# Altium PCB PCB.PcbDoc
Units mil, origin at the board's own origin, x right, y up, seen from the top; angles counter-clockwise.
Board outline 2362.2 x 2362.2 mil, 2 copper layers (Top Layer, Bottom Layer); 14 components, 6 nets, 38 pads, 20 vias.
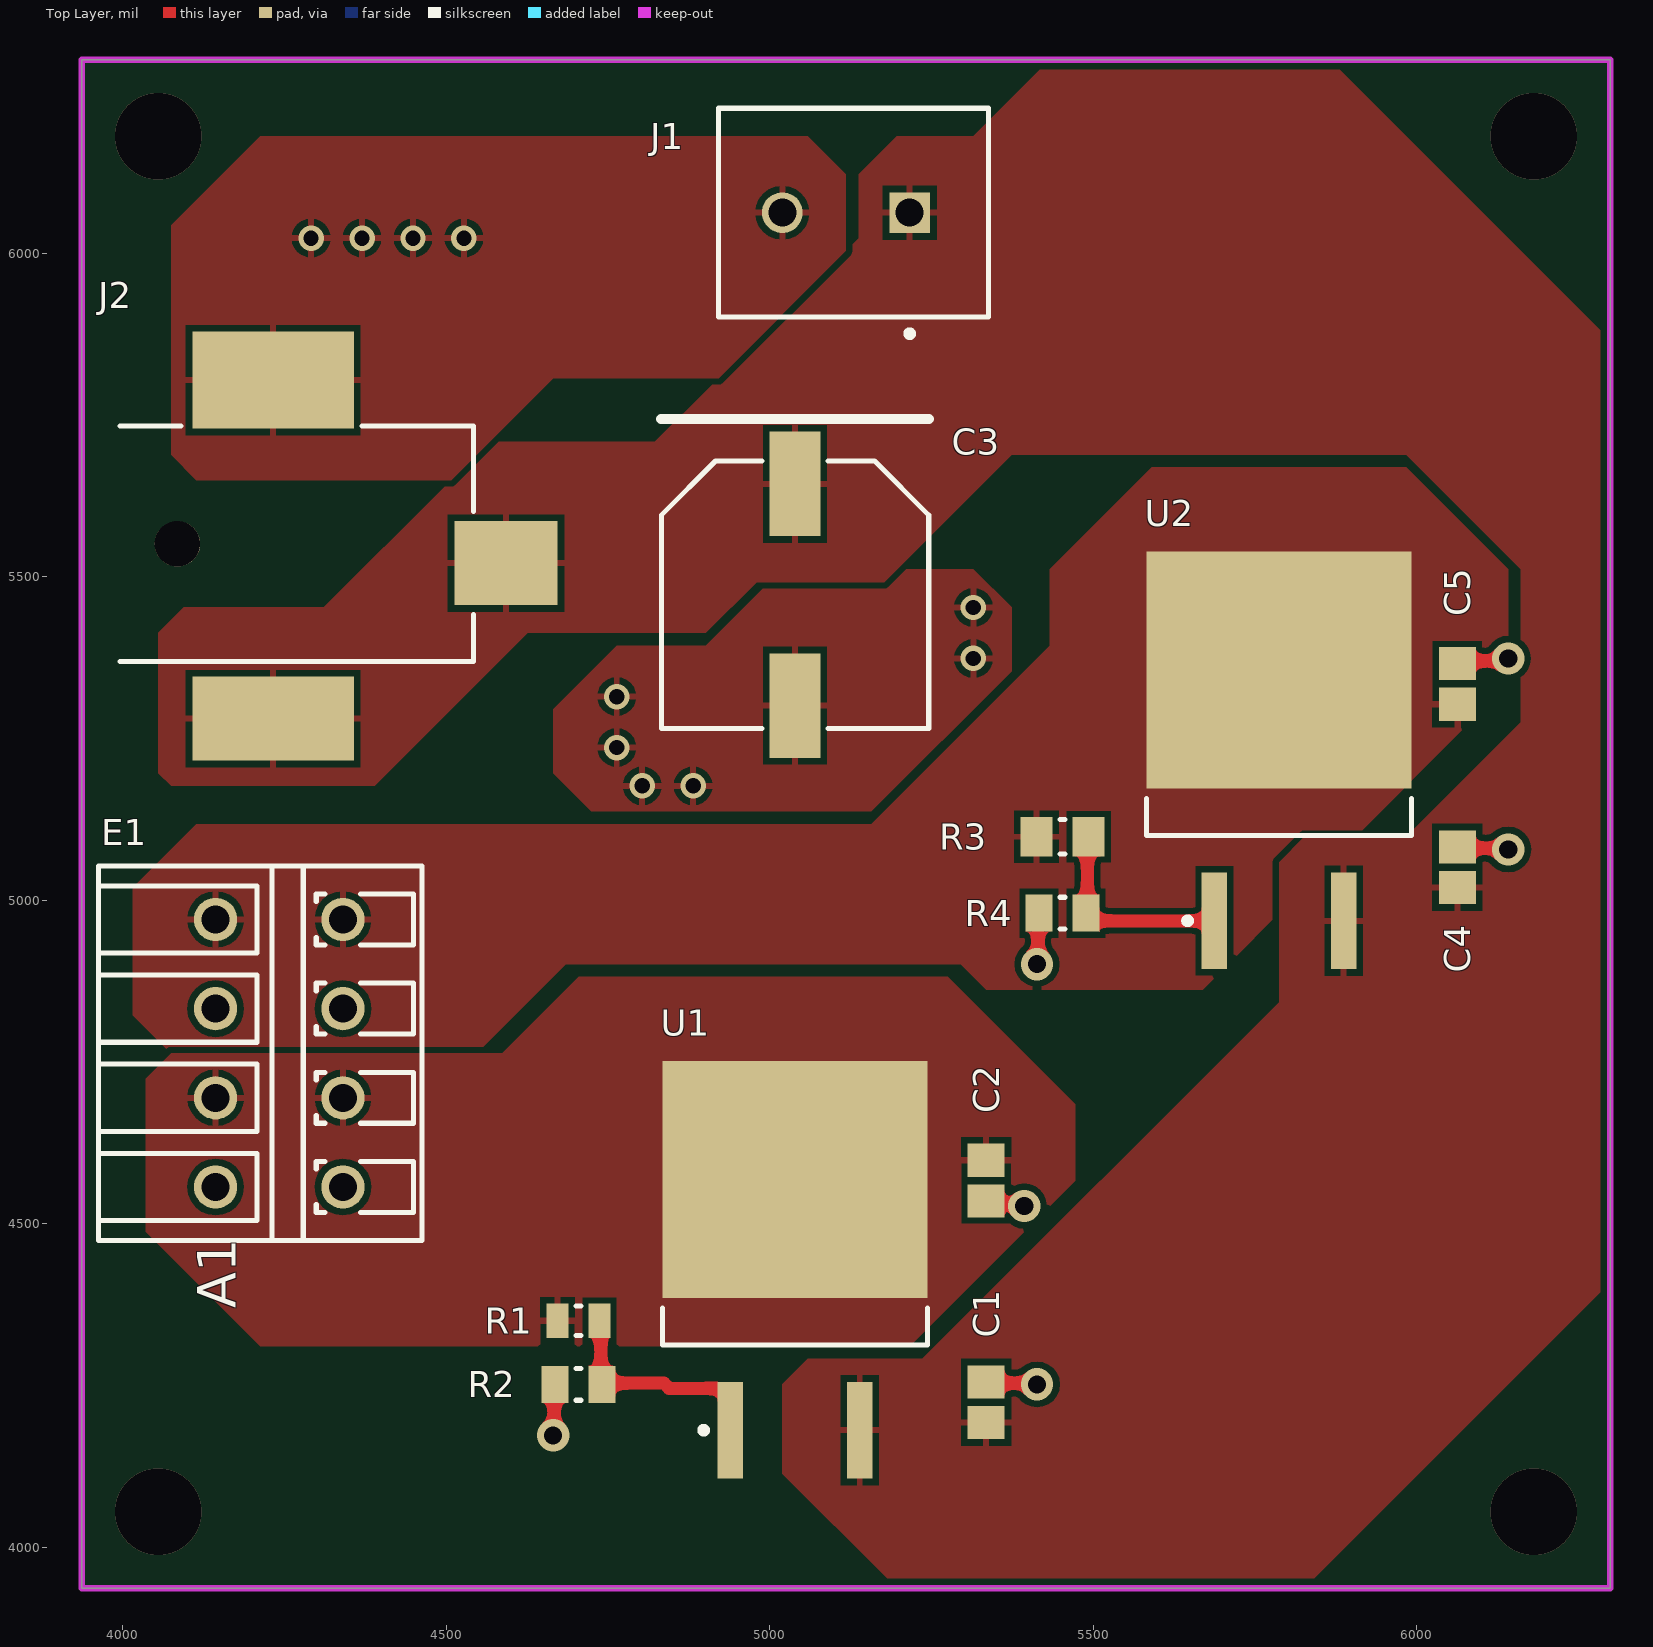
[diagram p0: Top Layer view]
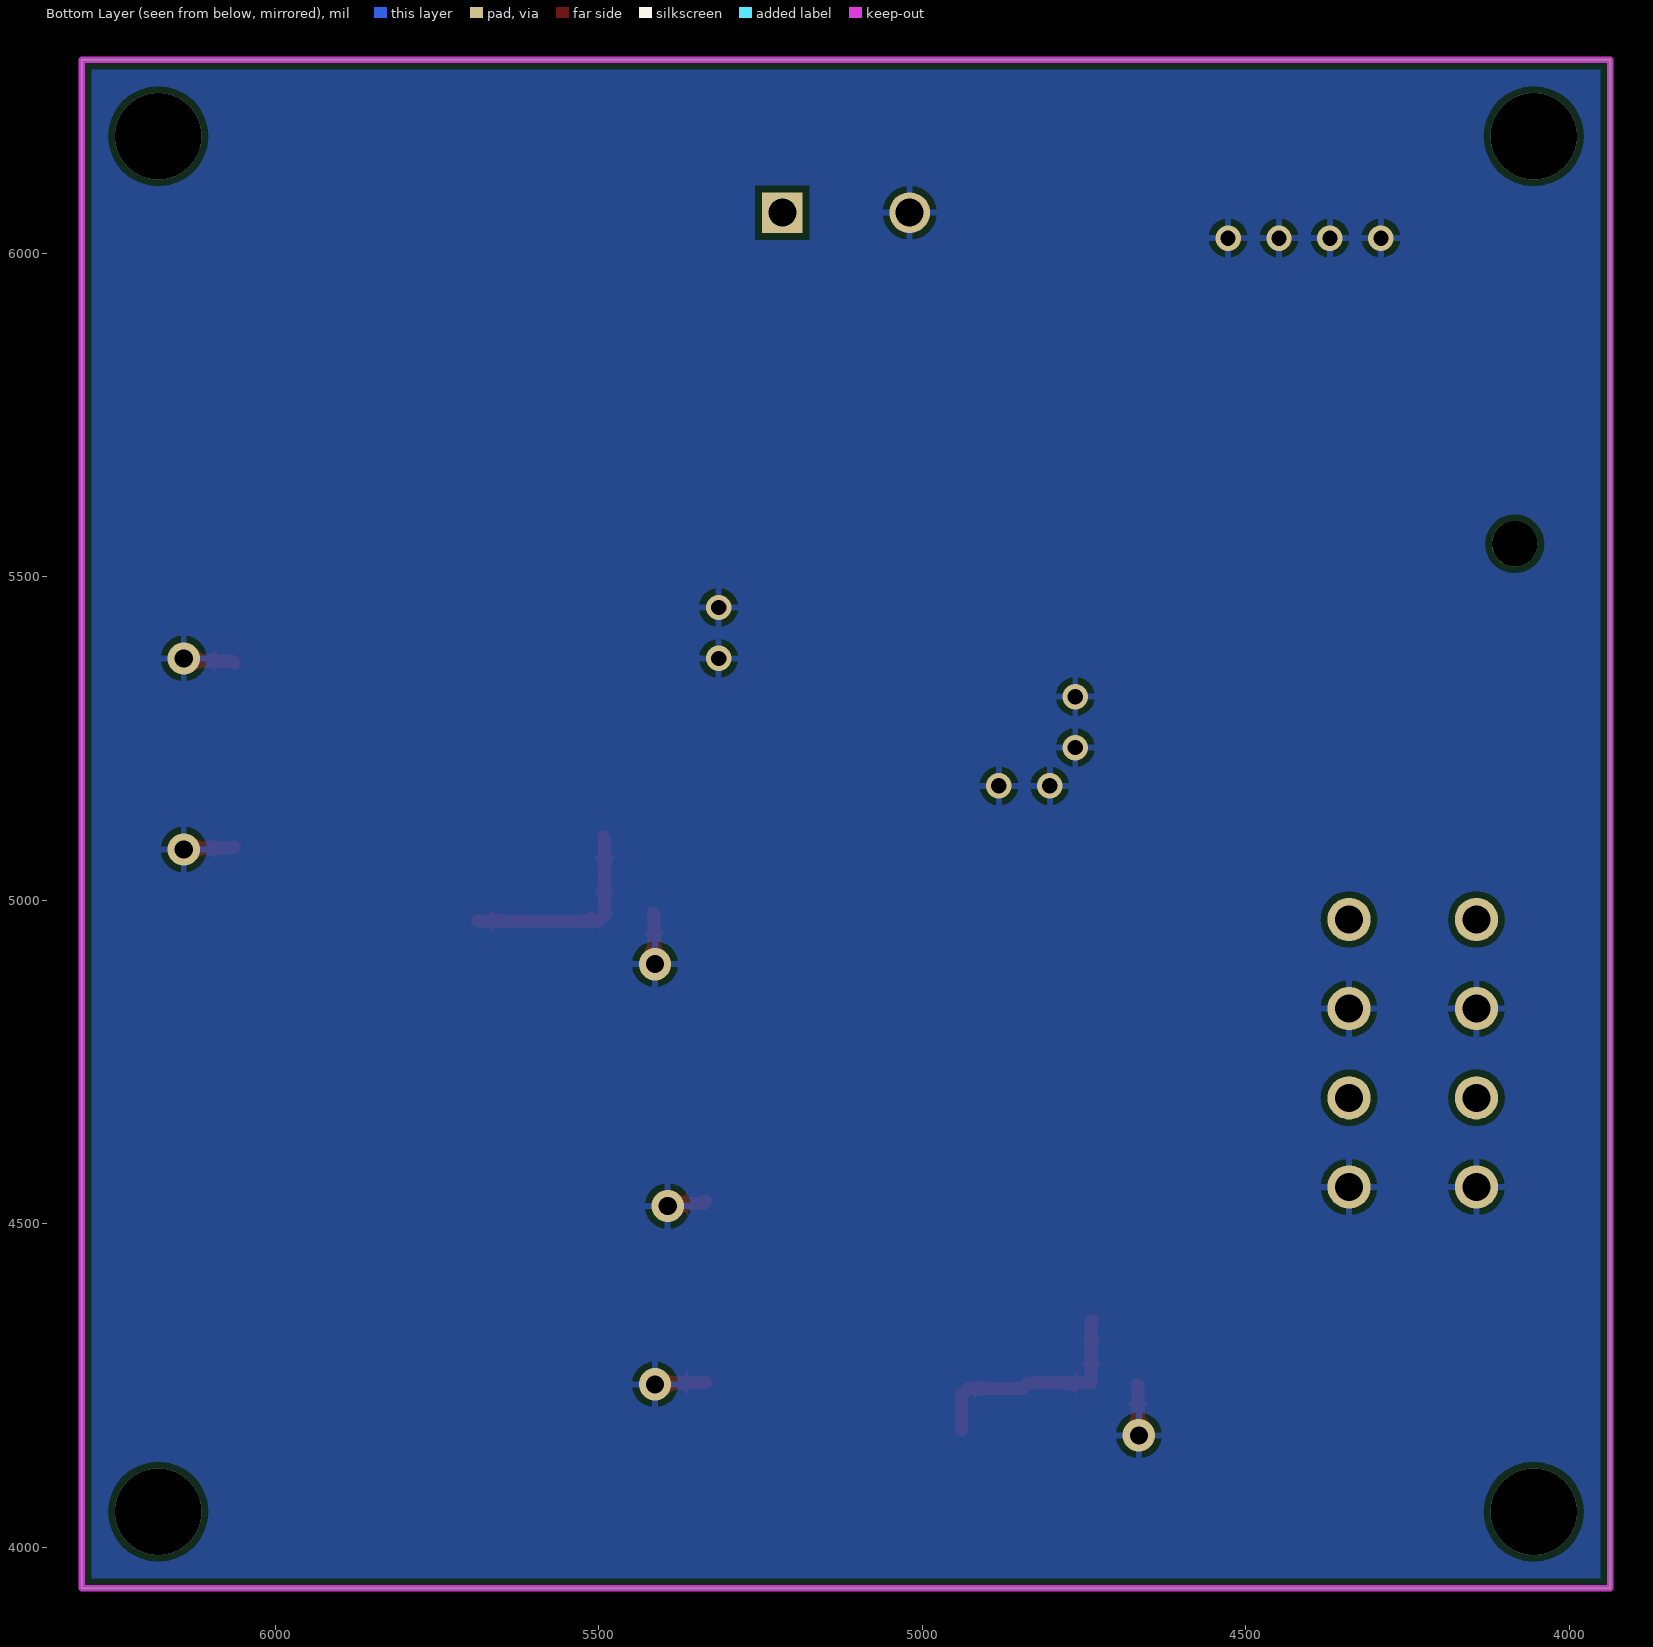
[diagram p1: Bottom Layer view, seen from below]

## Layer stack, top to bottom
Top Solder: solder mask 0.4, Solder Resist, Dk 3.5
Top Layer: signal copper 1.4
Dielectric 1: dielectric 12.6, FR-4, Dk 4.8
Bottom Layer: signal copper 1.4
Bottom Solder: solder mask 0.4, Solder Resist, Dk 3.5

## Board outline
3937.01,3937.01 6299.21,3937.01 6299.21,6299.21 3937.01,6299.21

## Design rules (kind name [scope] priority, off if disabled: settings)
Clearance [All] p1: gap=10 ignorepadtopadclearanceinfootprint=FALSE except(0: Arc-Hole Track-Hole SMDPad-Hole THPad-Hole Via-Hole Fill-Hole Poly-Hole Region-Hole Text-Hole)
HoleSize [All] p1: absolutevalues=TRUE maxlimit=250 minlimit=10 maxpercent=80.000 minpercent=20.000
MinimumSolderMaskSliver [All] p1: minsoldermaskwidth=6
PolygonConnect [All] p1: connectstyle=Relief reliefconductorwidth=10 reliefentries=4 polygonreliefangle="90 Angle" airgapwidth=10
RoutingVias [All] p1: holewidth=28 width=50 viastyle="Through Hole" minholewidth=28 minwidth=50 maxholewidth=28 maxwidth=50
SilkToSolderMaskClearance [IsPad] p1: minsilkscreentomaskgap=6 clearancetoexposedcopper=TRUE
SolderMaskExpansion [All] p1: expansion=4 istentingtop=FALSE
Width [All] p1: maxlimit=100 minlimit=6 preferedwidth=10
27 further rules are at their usual default settings.

## Classes and differential pairs
component class WP: J1 J2
component class RG: C1 C2 C3 C4 C5 R1 R2 R3 R4 U1 U2
component class CN: E1

## Components (designator, comment, footprint, x,y, rotation, side; value= is the part's Value field where it differs from the comment)
C1 "1uF" CAPC2013X100X50NL20T25 5334.65,4224.41 r270 top
C2 "1uF" CAPC2013X100X50NL20T25 5334.65,4566.93 r90 top
C3 "EEEFC1V101P" PNSC-FC-V-G_V 5039.37,5472.44 r270 top
C4 "1uF" CAPC2013X100X50NL20T25 6062.99,5051.18 r270 top
C5 "1uF" CAPC2013X100X50NL20T25 6062.99,5334.65 r270 top
E1 "1885200000" LSF_SMT_3_5_135_04 4212.6,4763.78 r90 top
J1 "282836-2" TECO-282836-2_V 5118.11,6062.99 r180 top
J2 "RASM722PTR13X" FP-RASM722PTR13X-MFG 4251.97,5551.18 r270 top
R1 "CRCW080513K0FKEA" RESC2013X50X30LL20T20 4704.72,4350.39 r180 top
R2 "CRCW08052K40FKEA" RESC2013X50X30NL20T20 4704.72,4251.97 r180 top
R3 "CRCW08059K10FKEA" RESC2013X50X30ML20T20 5452.76,5098.43 r180 top
R4 "CRCW08052K40FKEA" RESC2013X50X30NL20T20 5452.76,4980.32 r180 top
U1 "LM317D2T-TR" TO-263_N 5039.37,4429.13 r90 top
U2 "LM317D2T-TR" TO-263_N 5787.4,5216.54 r90 top

## Footprints (in the part's own frame and the unit in brackets; to place one, negate y for a bottom-side part, rotate by r counter-clockwise, add the part's x,y. Pads: shape width x height; smd on the part's side, far side on the other; paste and mask are expansions set on the pad)
CAPC2013X100X50NL20T25 [mm] "Chip Capacitor, 2-Leads, Body 2.00x1.25mm, IPC Medium Density"
  rect 1.3x1.45 smd: 1(-0.8,0) 2(0.8,0)
  body extent -1.1,-0.72 1.1,0.72, height 1
FP-RASM722PTR13X-MFG [mm]
  rect 3.3x4.06 smd paste+0 mask+0: 1(0.76,8.65)
  rect 3.81x6.35 smd paste+0 mask+0: 2(-6.43,-0.49)
  rect 3.3x6.35 smd paste+0 mask+0: 3(6.86,-0.49)
  round 1.78 hole 1.78 unplated paste-1000 mask+0: ""(0,-4.25)
  silkscreen extent -4.63,-6.5 4.63,7.38, body extent -8.43,-7.48 8.61,10.78, height 0.25
LSF_SMT_3_5_135_04 [mm] "OMNIMATE Signal - Serie LSF  LSF-SMT 3.50/04/135 1.5"
  round 1.7 hole 1.1: A1(-5.25,-3.25) A1(-5.25,1.75) A2(-1.75,1.75) A2(-1.75,-3.25) A3(1.75,1.75) A3(1.75,-3.25) A4(5.25,-3.25) A4(5.25,1.75)
  silkscreen extent -7.35,-6.35 7.35,6.35, body extent -7.35,-6.35 7.35,6.35, height 13.17
PNSC-FC-V-G_V [mm] "CAPAE, 2-Leads, Body 10.50x10.50mm"
  rect 4.1x2 smd: 1(-4.35,0) 2(4.35,0)
  silkscreen extent -6.9,-5.25 5.25,5.25, body extent -6,-5.25 6,5.25, height 10.5
RESC2013X50X30LL20T20 [mm] "Chip Resistor, 2-Leads, Body 2.00x1.25mm, IPC High Density"
  rect 0.85x1.35 smd: 1(-0.825,0) 2(0.825,0)
  silkscreen extent -0.1,-0.58 0.1,0.58, body extent -1.1,-0.72 1.1,0.72, height 0.5
RESC2013X50X30ML20T20 [mm] "Chip Resistor, 2-Leads, Body 2.00x1.25mm, IPC Low Density"
  rect 1.25x1.55 smd: 1(-1.025,0) 2(1.025,0)
  silkscreen extent -0.1,-0.67 0.1,0.67, body extent -1.1,-0.72 1.1,0.72, height 0.5
RESC2013X50X30NL20T20 [mm] "Chip Resistor, 2-Leads, Body 2.00x1.25mm, IPC Medium Density"
  rect 1.05x1.45 smd: 1(-0.925,0) 2(0.925,0)
  silkscreen extent -0.1,-0.63 0.1,0.63, body extent -1.1,-0.72 1.1,0.72, height 0.5
TECO-282836-2_V [mm] "Female Header, Pitch 5mm, 1 x 2 Position, Height 10mm"
  rect 1.6x1.6 hole 1.1: 1(-2.5,0)
  round 1.6 hole 1.1: 2(2.5,0)
  silkscreen extent -5.6,-4.1 5,4.87, body extent -5.6,-4.1 5,4.1, height 10
TO-263_N [mm] "D2-PAK, 4-Leads, Body 9.2x10.2mm, Pitch 2.54mm, Lead Span 15.4mm, IPC Medium Density"
  rect 3.8x1 smd: 1(-6.3,2.54) 3(-6.3,-2.54)
  rect 9.3x10.4 smd: 4(3.55,0)
  silkscreen extent -6.42,-5.2 -1.5,5.2, body extent -2.95,-5.2 6.4,5.2, height 4.6

## Part data
C1 C2 C4 C5: library part CMP-2007-03716-1, Manufacturer=Kemet, Part Number=C0805X105K3RACTU
C3: library part CMP-2000-06202-1, "Aluminum Electrolytic Capacitor, 100 uF, +/- 20%, 35 V, 2-Pin SMD (Size Code G), -40 to 105 degC, RoHS, Tape and Reel", AE Capacitor Case=RadialCan-SMD, Capacitance=100µF, Capacitance Tolerance=±20%, Impedance Frequency=100kHz, Impedance Temperature=20°C, Life Time @ Temperature=1000hours@105°C, Manufacturer=Panasonic, Operating life Time=1000h, Operating Temperature Max=105°C, Operating Temperature Min=-40°C, Operating Temperature Range=-40°Cto+105°C, Package / Case=G, Package Description="2-Pin Electrolytic Aluminum Capacitor, Body 10.3 x 10.3 mm", Package Reference=FC-V-G, Power Factor=0.12, Power Factor Frequency=120Hz, Ripple Current AC=220mA, Tolerance +=20%, Voltage Rating=35V, Capacitance Tolerance ±=±20%, Capacitor Case Style=RadialCan-SMD, Datasheet URL=http://industrial.panasonic.com/cdbs/www-data/pdf/RDE0000/ABA0000C1172.pdf, Datasheet Version=03/2016, Diameter=10mm, External Length / Height=10.2mm, External Width=10.3mm, Height=10.2mm, Impedance=0.4ohm, Lead Cross-section Width=0.9mm, Lifetime @ Temperature=1000hours@105°C, Manufacturer URL=http://www.panasonic.com/, Mounting Technology=SurfaceMount, MSL=(NotAvailable), Operating Lifetime=1000h, Package URL=http://industrial.panasonic.com/cdbs/www-data/pdf/RDE0000/DME0000COL48.pdf, Packaging=CutTape, Power Factor Temperature=20°C, Product Range=PANASONIC-FCSeries, Ripple Current Frequency=100kHz, Ripple Current Temperature=105°C, Series=FC, SVHC=ToBeAdvised, Tape Width=16mm, Tolerance -=20%, Voltage Rating V DC=35V
E1: library part CMP-1559-02099-1, "OMNIMATE Signal - series LSF", Colour=Black, Manufacturer=Weidmueller, Rated_current_min_no_of_poles_TU_20_deg_C="19 A", Rated_current_use_group_B_UL_1059="12 A", Rated_voltage_for_surge_voltage_class_pollution_degree_II_2="320 V", Rated_voltage_use_group_B_UL_1059="300 V", UL_94_flammability_rating=V-0, ComponentLink1Description="Manufacturer URL", ComponentLink1URL=http://www.weidmueller.com/, ComponentLink2Description="URL Link1", ComponentLink2URL=http://catalog.weidmueller.com/catalog/Start.do?localeId=en&ObjectID=1885200000, Contact_material=Cu-Leg, Contact_surface=tinned, Insulating_material="LCP GF", Mounting_onto_the_PCB="Reflow solder connection", No_of_poles=4, PackageReference=LSF_SMT_3_5_135_04, Packaging=Tube, PartNumber=1885200000, Pitch_inch="0,138 inch", Pitch_mm="3,5 mm", Qty="37 PCS", Revision=V1, Short_text_for_material="LSF-SMT 3.50/04/135 1.5SN BK TU", Side_termination_characteristic="closed side", Solder_pin_length_mm="1,5 mm", Solid_max_H05_07_V_U="1,5 mm²", Solid_min_H05_07_V_U="0,2 mm²", Wire_cross_section_AWG_max_UL_1059="AWG 16", Wire_cross_section_AWG_min_UL_1059="AWG 24"
J1: library part CMP-1684-00017-1, "Female Header, Pitch 5 mm, 1 x 2 Position, Height 10 mm, Tail Length 3.5 mm, Rohs, Bulk", Color=Green, Current=13.5A, Manufacturer="TE Connectivity", Package Description="Female Header, Pitch 5 mm, 1 x 2 Position, Height 10 mm, Tail Length 3.5 mm", Package Reference=THD, Standard Package=300, Voltage=300V, 3D Model=282836-2.pdf, Category=Connectors,Interconnects, Clamp Material - Plating=Brass-NickelPlated, Contact Material - Plating=Brass-TinPlated, Datasheet URL=http://www.te.com.cn/commerce/DocumentDelivery/DDEController?Action=showdoc&DocId=Catalog+Section%7F1308389_EUROSTYLE_TERMINAL_BLOCKS%7F0607%7Fpdf%7FEnglish%7FENG_CS_1308389_EUROSTYLE_TERMINAL_BLOCKS_0607.pdf%7F282836-2, Dynamic Catalog=BuchananSeries, Family=TerminalBlocks-WiretoBoard, Featured Product=EurostyleTerminalBlockConnectors, Features=Interlocking(Side), Housing Material=Polyamide(PA66),Nylon6/6, Manufacturer URL=http://www.te.com, Mating Orientation=HorizontalwithBoard, Mounting Type=ThroughHole, Number of Levels=1, Other Names="5ULV-02B / A98076", Packaging=Bulk, Pitch="0.197\"(5.00mm)", Positions Per Level=2, Product Training Modules=Wire-to-BoardEurostyleTerminalBlocks, RoHS Information=282836-2StatementofCompliance, Screw Material - Plating=Brass-NickelPlated, Screw Thread=M3, Series=Buchanan, Torque - Screw=0.68Nm(6Lb-In), Wire Gauge=16-30AWG, Wire Termination=Screw-RisingCageClamp
J2: library part CMP-47995-000002-1, "CONN PWR JACK 2.1X5.5MM SOLDER", Case/Package=SMD/SMT, Color=Black, Current Rating=5A, Package Quantity=120, Connector Type=Jack, Contact Material="Copper Alloy", Contact Plating=Tin, Gender=Male, Housing Color=Black, Housing Material=Thermoplastic, Mount="Surface Mount", Shielding=Unshielded, Termination=Solder
R1: library part CMP-2001-04945-1, Manufacturer="Vishay Dale", Part Number=CRCW080513K0FKEA
R2 R4: library part CMP-2001-03768-1, Manufacturer="Vishay Dale", Part Number=CRCW08052K40FKEA
R3: library part CMP-2001-04176-1, Manufacturer="Vishay Dale", Part Number=CRCW08059K10FKEA
U1 U2: library part CMP-0244-00094-1, "1.5A, 1.2V to 37V Adjustable Voltage Regulator, 3-Pin D2PAK, Tape and Reel", ComponentLink1Description="Manufacturer URL", ComponentLink1URL=http://www.st.com, ComponentLink2Description=Datasheet, ComponentLink2URL=http://www.st.com/internet/com/TECHNICAL_RESOURCES/TECHNICAL_LITERATURE/DATASHEET/CD00000455.pdf, DatasheetVersion=1/11/2011, PackageDescription="3-Pin Transistor Outline Package 2.54 mm Pitch, 15.4 mm Lead Span (D2PAK)", PackageReference=TO-263, PackageVersion=2011

## Via types
v1: diameter 39.37, hole 23.62, Top Layer to Bottom Layer, 10 vias
v2: diameter 50, hole 28, Top Layer to Bottom Layer, 6 vias
v3: diameter 133.86, hole 133.86, Top Layer to Bottom Layer, 4 vias

## Nets (pads, with @x,y where several pads share a name; then routed paths per layer and width w, separated by ;. In a path a pad name is that pad's centre, name@x,y a point inside that pad or via, vN(x,y) a via of type N, cw(c..) or ccw(c..) an arc to the next point about the centre after c; other vN are vias at no path point)
+6V: C5.2 E1.A4 R3.2 U2.4
+8V: C2.2 E1.A2 R1.2 U1.4
+12V_Unreg: C1.2 C3.1 C4.2 J1.1 J2.1 J2.3 U1.3 U2.3
GND: C1.1 C2.1 C3.2 C4.1 C5.1 E1.A1 E1.A3 J1.2 J2.2 R2.2 R4.2 | length 465
  Top Layer w20: v2(4665.35,4173.23) 4666.83,4174.7 4666.83,4250.49 R2.2 ; C1.1 5336.61,4253.94 5411.42,4253.94 v2(5413.39,4251.97) ; C2.1 5338.58,4531.5 5389.76,4531.5 v2(5393.7,4527.56) ; v2(5413.39,4901.57) 5414.86,4903.05 5414.86,4978.84 R4.2 ; C4.1 6064.96,5080.71 6139.76,5080.71 v2(6141.73,5078.74) ; C5.1 6066.93,5370.08 6137.8,5370.08 v2(6141.73,5374.02)
  other v1: 4803.15,5177.17 4881.89,5177.17 4763.78,5236.22 4763.78,5314.96 5314.96,5374.02 5314.96,5452.76 4291.34,6023.62 4370.08,6023.62 4448.82,6023.62 4527.56,6023.62
NetR1_1: R1.1 R2.1 U1.1 | length 359.9
  Top Layer w20: R1.1 4739.17,4348.43 4739.17,4253.94 4836.73,4253.94 4844.76,4245.91 4929.69,4245.91 4939.37,4236.22 U1.1
NetR3_1: R3.1 R4.1 U2.1 | length 323.5
  Top Layer w20: R3.1 5491.14,5096.46 5491.14,4982.28 R4.1 5489.17,4979.17 5499.84,4968.5 U2.1
pads on no net: J2.
copper on no net:
  other v3: 4055.12,4055.12 6181.1,4055.12 4055.12,6181.1 6181.1,6181.1

## Polygon pours and split planes (outlines as drawn)
GND on Bottom Layer "GND_L02_P000" (solid, pour order 0): 3937.01,6299.21 6299.21,6299.21 6299.21,3937.01 3937.01,3937.01
+6V on Top Layer "+6V_L01_P004" (solid, pour order 4): 4074.8,4763.78 4015.75,4822.83 4015.75,5019.69 4114.17,5118.11 5157.48,5118.11 5433.07,5393.7 5433.07,5511.81 5590.55,5669.29 5984.25,5669.29 6141.73,5511.81 6141.73,5334.65 5669.29,4862.2 5334.65,4862.2 5295.28,4901.57 4685.04,4901.57 4547.24,4763.78
GND on Top Layer "GND_L01_P005" (solid, pour order 5): 4763.78,5393.7 4901.57,5393.7 5019.68,5511.81 5314.96,5511.81 5374.02,5452.76 5374.02,5354.33 5157.48,5137.8 4724.41,5137.8 4665.35,5196.85 4665.35,5295.28
+8V on Top Layer "+8V_L01_P003" (solid, pour order 3): 5216.54,4311.02 5472.44,4566.93 5472.44,4685.04 5275.59,4881.89 4704.72,4881.89 4586.61,4763.78 4074.8,4763.78 4035.43,4724.41 4035.43,4488.19 4212.6,4311.02
+12V_Unreg on Top Layer "+12V_UNREG_L01_P002" (solid, pour order 2): 5826.77,3937.01 6299.21,4409.45 6299.21,5866.14 5866.14,6299.21 5433.07,6299.21 5314.96,6181.1 5196.85,6181.1 5137.8,6122.05 5137.8,6023.62 4822.83,5708.66 4566.93,5708.66 4311.02,5452.76 4094.49,5452.76 4055.12,5413.39 4055.12,5196.85 4074.8,5177.17 4389.76,5177.17 4625.98,5413.39 4901.57,5413.39 4980.31,5492.13 5177.17,5492.13 5374.02,5688.98 5984.25,5688.98 6161.42,5511.81 6161.42,5275.59 5984.25,5098.43 5826.77,5098.43 5787.4,5059.06 5787.4,4842.52 5236.22,4291.34 5059.06,4291.34 5019.69,4251.97 5019.69,4114.17 5196.85,3937.01
GND on Top Layer "GND_L01_P001" (solid, pour order 1): 4074.8,5688.98 4074.8,6043.31 4212.6,6181.1 5059.06,6181.1 5118.11,6122.05 5118.11,6003.94 4921.26,5807.09 4665.35,5807.09 4507.87,5649.61 4114.17,5649.61

## Keep-outs
Keep-Out Layer:
  the board outline again, w10

## Text inside footprints (layer, text, board x,y; h text height)
E1: Top Overlay "A1" at 4175,4369.61 h59.06 r90